# Altium PCB PCB_TPEL_Non_Isolated_DC_DC.PcbDoc
Units mil, origin at the board's own origin, x right, y up, seen from the top; angles counter-clockwise.
Board outline 6000 x 4000 mil, 2 copper layers (Top Layer, Bottom Layer); 65 components, 39 nets, 203 pads, 0 vias.
Unrouted connection lines stored in the file: 150.
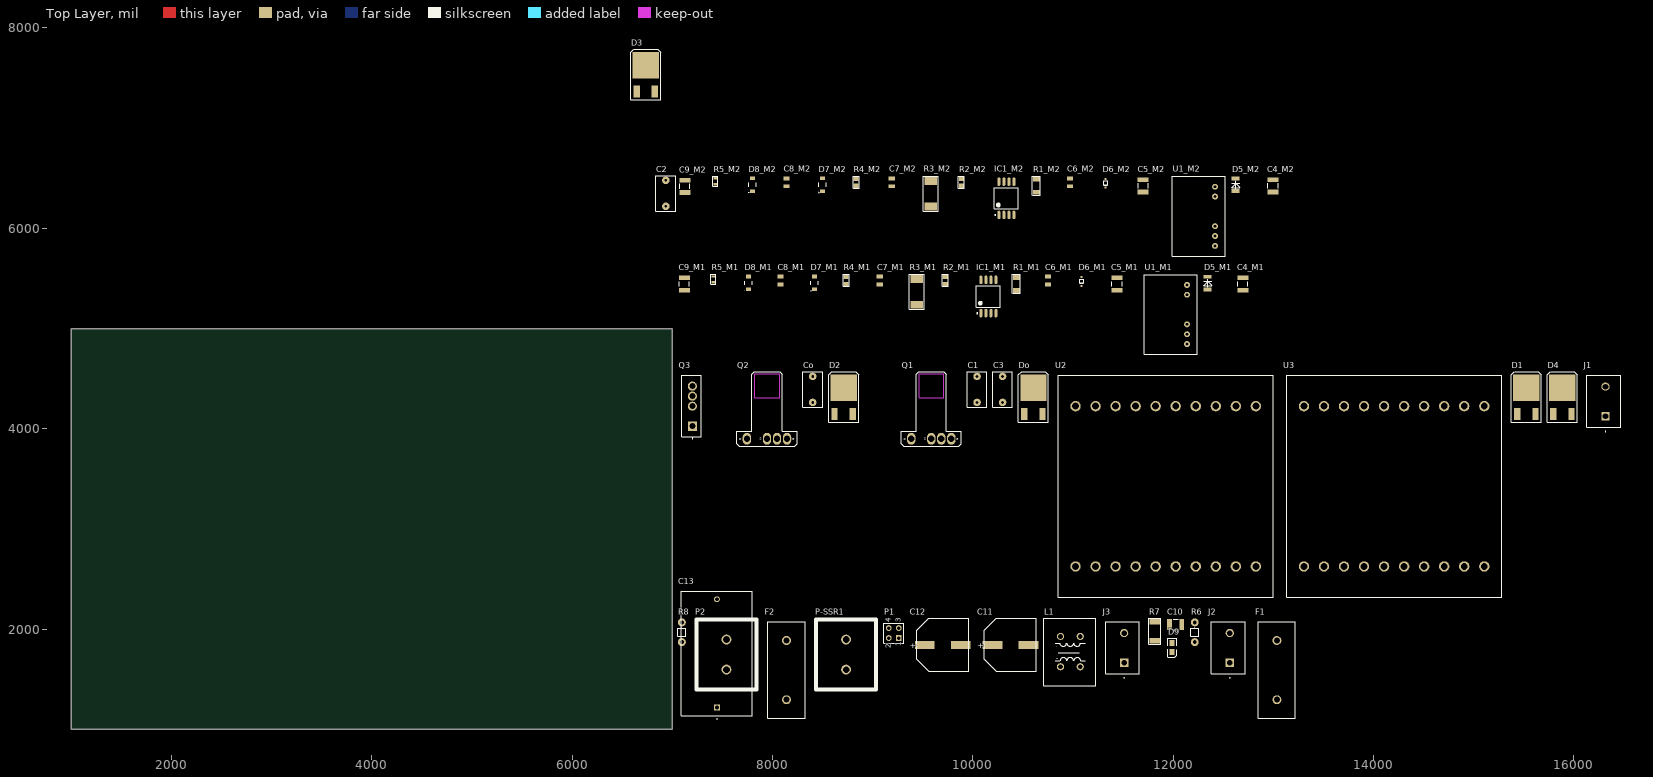
[diagram p0: Top Layer view]
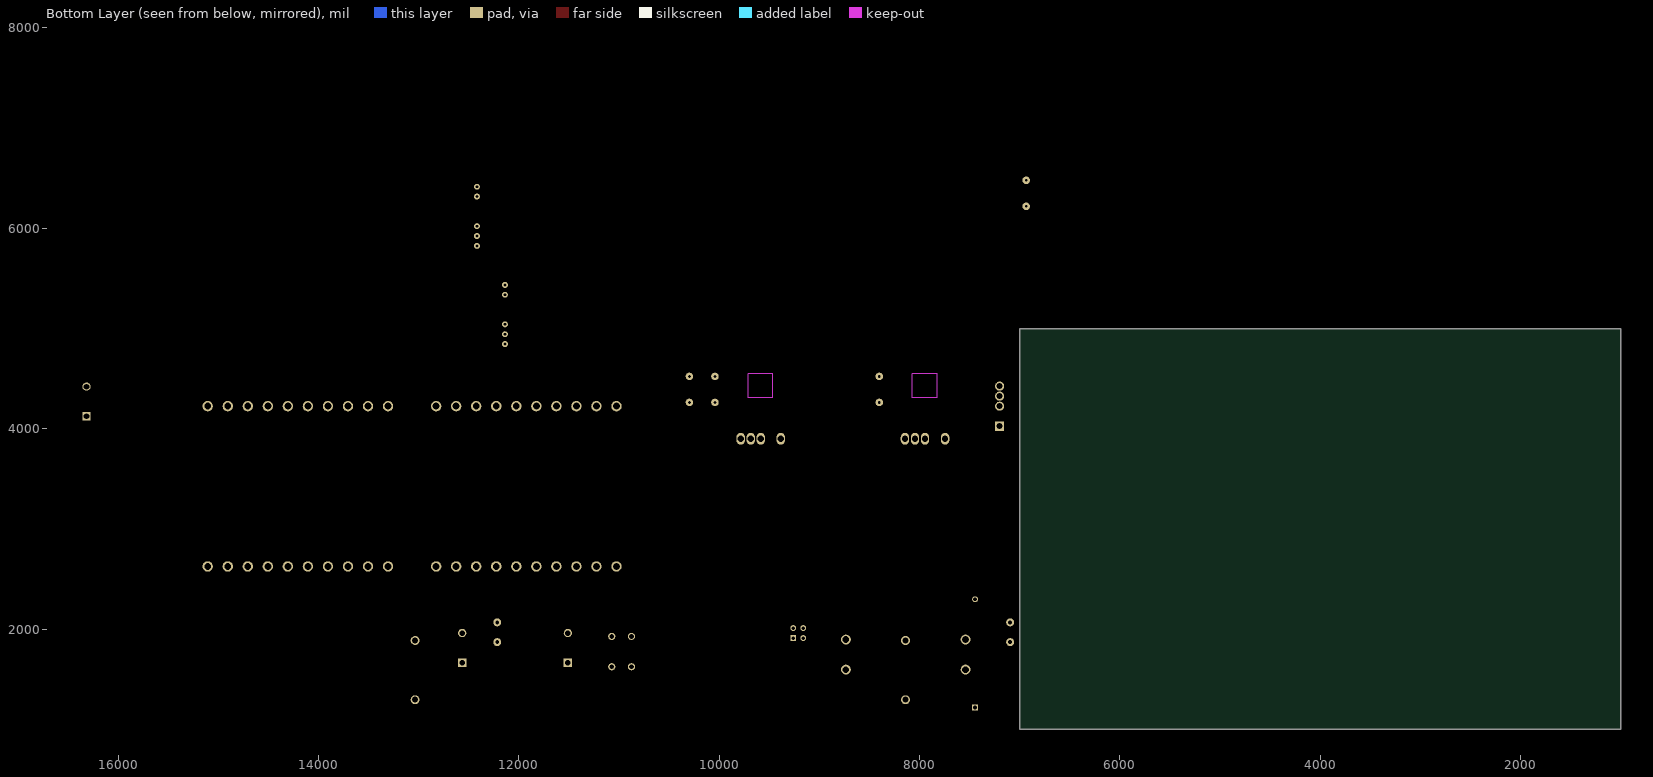
[diagram p1: Bottom Layer view, seen from below]

## Layer stack, top to bottom
Top Solder: solder mask 0.4, Solder Resist, Dk 3.5
Top Layer: signal copper 1.4
Dielectric 1: dielectric 12.6, FR-4, Dk 4.8
Bottom Layer: signal copper 1.4
Bottom Solder: solder mask 0.4, Solder Resist, Dk 3.5

## Board outline
1000,1000 7000,1000 7000,5000 1000,5000

## Design rules (kind name [scope] priority, off if disabled: settings)
Clearance [All] p1: gap=10 ignorepadtopadclearanceinfootprint=FALSE except(0: Arc-Hole Track-Hole SMDPad-Hole THPad-Hole Via-Hole Fill-Hole Poly-Hole Region-Hole Text-Hole)
PolygonConnect [All] p1: connectstyle=Relief reliefconductorwidth=10 reliefentries=4 polygonreliefangle="90 Angle" airgapwidth=10
RoomDefinition RoomDefinition_1 [False vs False] p1: confinementstyle=ConfineIn formatcopy=TRUE lockcomponents=FALSE outline 5890,9240 7480,9240 7480,7970 5890,7970
RoutingVias [All] p1: holewidth=28 width=50 viastyle="Through Hole" minholewidth=28 minwidth=50 maxholewidth=28 maxwidth=50
SolderMaskExpansion [All] p1: expansion=4 istentingtop=FALSE
Width [All] p1: maxlimit=10 minlimit=10 preferedwidth=10
30 further rules are at their usual default settings.

## Classes and differential pairs
channel class Driver: M1 M2
net class Signal: +12V MS2 NetC7_M1_1 NetC7_M1_2 NetC7_M2_1 NetC7_M2_2 Sig1 Sig2
net class Sig[2..1]: Sig1 Sig2
net class Power: G1 G2 MS2 NetC1_1 NetC1_2 NetC2_2 NetC3_1 NetC3_2 NetC13_1 NetD1_1 NetF1_1 NetF2_1 NetF2_2 NetQ1_2 NetU2_11 PGND Vin1
net class MS[2..1]: MS2
net class G[2..1]: G1 G2
net class Driver: G1 G2 MS2 NetC5_M1_2 NetC5_M2_2 NetC8_M1_1 NetC8_M2_1 NetD5_M1_1 NetD5_M2_1 NetD7_M1_2 NetD7_M2_2 NetIC1_M1_7 NetIC1_M2_7
net class +12: +12V MS2 NetC11_1 NetC11_2 NetD9_1
component class "Power Board": C1 C2 C3 Co D1 D2 D3 D4 Do J1 Q1 Q2 Q3 U2 U3
component class Main_Clean: C10 C11 C12 C13 D9 F1 F2 J2 J3 L1 P1 P2 P-SSR1 R6 R7 R8
component class M2: C4_M2 C5_M2 C6_M2 C7_M2 C8_M2 C9_M2 D5_M2 D6_M2 D7_M2 D8_M2 IC1_M2 R1_M2 R2_M2 R3_M2 R4_M2 R5_M2 U1_M2
component class M1: C4_M1 C5_M1 C6_M1 C7_M1 C8_M1 C9_M1 D5_M1 D6_M1 D7_M1 D8_M1 IC1_M1 R1_M1 R2_M1 R3_M1 R4_M1 R5_M1 U1_M1

## Components (designator, comment, footprint, x,y, rotation, side; value= is the part's Value field where it differs from the comment)
C1 "C_ceram_HV" CAP_250V 10140,4215 r90 top
C2 "C_ceram_HV" CAP_250V 6836.57,6527.09 r270 top
C3 "C_ceram_HV" CAP_250V 10395,4215 r90 top
C4_M1 "Cer_large" CAPC3227X25N 12695,5445 r90 top value=22mkF (schematic designator C4)
C4_M2 "Cer_large" CAPC3227X25N 12995,6425 r90 top value=22mkF (schematic designator C4)
C5_M1 "Cer_large" CAPC3227X25N 11440,5445 r90 top value=22mkF (schematic designator C5)
C5_M2 "Cer_large" CAPC3227X25N 11700,6425 r90 top value=22mkF (schematic designator C5)
C6_M1 "C0805C104K5RAC" C_0805 10750,5440 r90 top value=0.1uF (schematic designator C6)
C6_M2 "C0805C104K5RAC" C_0805 10970,6420 r90 top value=0.1uF (schematic designator C6)
C7_M1 "C0805C100J1GAC" C_0805 9070,5440 r90 top value=10pF (schematic designator C7)
C7_M2 "C0805C100J1GAC" C_0805 9190,6420 r90 top value=10pF (schematic designator C7)
C8_M1 "C0805C104K5RAC" C_0805 8080,5440 r90 top value=0.1uF (schematic designator C8)
C8_M2 "C0805C104K5RAC" C_0805 8140,6420 r90 top value=0.1uF (schematic designator C8)
C9_M1 "Cer_large" CAPC3227X25N 7120,5445 r90 top value=22mkF (schematic designator C9)
C9_M2 "Cer_large" CAPC3227X25N 7125,6420 r90 top value=22mkF (schematic designator C9)
C10 "Cer_large" CAPC3227X25N 12025,2045 r0 top value=22mkF
C11 "NACEW102M25V12.5X14" Cap_pol 8985,2980 r0 top value="1 mF"
C12 "NACEW102M25V12.5X14" Cap_pol 8310,2980 r0 top value="1 mF"
C13 "B32924P3335M000" B32924P_(31.5_x_18) 7445,1215 r90 top
Co "C_ceram_HV" CAP_250V 8500,4215 r90 top
D1 "Diode" Dpak 15375,4065 r0 top
D2 "Diode" Dpak 8560,4065 r0 top
D3 "Diode" Dpak 6585.55,7284.81 r0 top
D4 "Diode" Dpak 15735,4065 r0 top
D5_M1 "Zener_1.8V" SOD123 12225,5505 r90 top value=1.8V (schematic designator D5)
D5_M2 "Zener_1.8V" SOD123 12505,6485 r90 top value=1.8V (schematic designator D5)
D6_M1 "DZ2J220M0L" SOD323F 11085,5470 r90 top value="22V, 200mW" (schematic designator D6)
D6_M2 "DZ2J220M0L" SOD323F 11325,6450 r90 top value="22V, 200mW" (schematic designator D6)
D7_M1 "MMSZ4678T1G" CAPM3216X18N 8420,5455 r90 top value="6V, 500mW" (schematic designator D7)
D7_M2 "MMSZ4678T1G" CAPM3216X18N 8500,6435 r90 top value="6V, 500mW" (schematic designator D7)
D8_M1 "MMSZ4678T1G" CAPM3216X18N 7760,5455 r90 top value="6V, 500mW" (schematic designator D8)
D8_M2 "MMSZ4678T1G" CAPM3216X18N 7800,6435 r90 top value="6V, 500mW" (schematic designator D8)
D9 "LED1" 0805_LED 11990,1815 r180 top
Do "Diode" Dpak 10455,4065 r0 top
F1 "0PTF0075P" 0PTF0075P 13035,1295 r90 top
F2 "0PTF0075P" 0PTF0075P 8140,1295 r90 top
IC1_M1 "ACPL-H342" SOIC127P970X330-8N 10155,5320 r90 top value="2,5 A, 12-30V" (schematic designator IC1)
IC1_M2 "ACPL-H342" SOIC127P970X330-8N 10335,6300 r90 top value="2,5 A, 12-30V" (schematic designator IC1)
J1 "1766453" 1766453 16315,4125 r90 top
J2 "1766453" 1766453 12565,1665 r90 top
J3 "1766453" 1766453 11510,1665 r90 top
L1 "Commom_mode_choke" Common_mode 10950,1730 r0 top value="20 mH 0.5 A"
P1 "Header 2X2" HDR2X2 9260,1910 r90 top
P2 "MB322-750M02" 2_HOLES_7.5 7540,1895 r90 top value="2 poles, 16A, 750V"
P-SSR1 "MB322-750M02" 2_HOLES_7.5 8735,1895 r90 top value="2 poles, 16A, 750V"
Q1 "Cree_4wires" VT4_SicMosfet 9585,3900 r90 top
Q2 "Cree_4wires" VT4_SicMosfet 7945,3900 r90 top
Q3 "NTH4L015N065SC1" NTH4L015N065SC1 7200,4025 r90 top
R1_M1 "RK73H2BTTD1002F" SMD_1206 10435,5420 r90 top value="10k, 0.25 W" (schematic designator R1)
R1_M2 "RK73H2BTTD1002F" SMD_1206 10635,6400 r90 top value="10k, 0.25 W" (schematic designator R1)
R2_M1 "RK73H2ATTD1600F" SMD_0805 9725,5480 r90 top value="160R, 0.125W" (schematic designator R2)
R2_M2 "RK73H2ATTD1600F" SMD_0805 9885,6460 r90 top value="160R, 0.125W" (schematic designator R2)
R3_M1 "RK73B3ATTE120J" SMD_2512 9440,5365 r90 top value="12, 1W" (schematic designator R3)
R3_M2 "RK73B3ATTE120J" SMD_2512 9580,6345 r90 top value="12, 1W" (schematic designator R3)
R4_M1 "RK73H2ATTD1600F" SMD_0805 8735,5480 r90 top value="160R, 0.125W" (schematic designator R4)
R4_M2 "RK73H2ATTD1600F" SMD_0805 8835,6460 r90 top value="160R, 0.125W" (schematic designator R4)
R5_M1 "R4K7" smd_0603 7410,5490 r90 top value="4.7K, 0.125W" (schematic designator R5)
R5_M2 "R4K7" smd_0603 7430,6470 r90 top value="4.7K, 0.125W" (schematic designator R5)
R6 "Varistor" "Axial 0.2" 12215,1870 r90 top value=615V
R7 "R300" SMD_2010 11815,1975 r90 top value="300, 0.125W"
R8 "Varistor" "Axial 0.2" 7095,1870 r90 top value=615V
U1_M1 "MGJ2D242005SC" MGJ2 12315,5160 r0 top value=2W (schematic designator U1)
U1_M2 "MGJ2D242005SC" MGJ2 12595,6140 r0 top value=2W (schematic designator U1)
U2 "B66368B1020T1" B66368B1020T1 11025,2625 r0 top
U3 "B66368B1020T1" B66368B1020T1 13305,2625 r0 top

## Footprints (in the part's own frame and the unit in brackets; to place one, negate y for a bottom-side part, rotate by r counter-clockwise, add the part's x,y. Pads: shape width x height; smd on the part's side, far side on the other; paste and mask are expansions set on the pad)
0PTF0075P [mm]
  round 2.25 hole 1.5: 1(0,0) 2(15,0)
  round 1.325 hole 2.65 unplated: MH1(7.5,0)
  silkscreen extent -4.7,-4.7 19.7,4.7, body extent -4.7,-4.7 19.7,4.7, height 11.42
2_HOLES_7.5 [mm]
  round 2.5 hole 1.7: 1(-7.62,0) 2(0,0)
  silkscreen extent -12.7,-7.62 5.08,7.62
0805_LED [mil]
  rect 50x60 smd: A(0.2,-44.8) K(0.2,45.2)
  silkscreen extent -45,-95 45,95
1766453 [mm]
  rect 2.1x2.1 hole 1.4: 1(0,0)
  round 2.1 hole 1.4: 2(7.5,0)
  silkscreen extent -3.9,-3.87 10.35,4.7, body extent -2.9,-3.89 10.3,4.71, height 12.6
"Axial 0.2" [mm]
  round 2 hole 1: 1(0,0) 2(5,0)
  silkscreen extent 1.4,-1 3.68,1
B32924P_(31.5_x_18) [mm]
  rect 1.5x1.5 hole 1: 1(0,0)
  round 1.5 hole 1: 2(27.5,0)
  silkscreen extent -2.9,-9 29.5,9, body extent -1.94,-9 29.56,9, height 32.85
B66368B1020T1 [mm]
  round 2.625 hole 1.75: 1(0,0) 2(5.08,0) 3(10.16,0) 4(15.24,0) 5(20.32,0) 6(25.4,0) 7(30.48,0) 8(35.56,0) 9(40.64,0) 10(45.72,0) 11(45.72,40.64) 12(40.64,40.64) 13(35.56,40.64) 14(30.48,40.64) 15(25.4,40.64) 16(20.32,40.64) 17(15.24,40.64) 18(10.16,40.64) 19(5.08,40.64) 20(0,40.64)
  silkscreen extent -4.39,-7.78 50.11,48.42, body extent -4.39,-7.78 50.11,48.42, height 41
C_0805 [mm]
  rect 1x1.6 smd: 1(0,0) 2(2,0)
  body extent 0.02,-0.62 2.02,0.63, height 0.78
CAP_250V [mm]
  round 1.905 hole 0.7: 1(1.2,2.5) 2(7.8,2.5)
  silkscreen extent 0,0 9,5
Cap_pol [mil]
  rect 196.85x78.74 smd mask+4: 1(1210,-1140)
  rect 196.85x78.74 smd: 2(1570,-1140)
  silkscreen extent 1130,-1400 1650,-870
CAPC3227X25N [mm] "Chip Capacitor, 2-Leads, Body 3.2x2.7mm, IPC Medium Density"
  rect 1.15x2.8 smd: 1(-1.575,0) 2(1.575,0)
  silkscreen extent -0.6,-1.3 0.6,1.3, body extent -1.75,-1.35 1.75,1.35, height 2.5
CAPM3216X18N [mm]
  rect 0.91x1.22 smd: 1(-1.635,0) 2(1.635,0)
  silkscreen extent -2.04,-0.95 0.48,1, body extent -1.42,-0.9 1.42,0.9, height 1.35
Common_mode [mm]
  round 1.8 hole 1.2: 1(-1.9,5) 2(-1.9,-2.7) 3(3.1,-2.7) 4(3.1,5)
  silkscreen extent -6.1,-7.5 7,9.6
Dpak [mm]
  rect 1.6x3 smd: 1(1.51,2.037) 3(6.11,2.037)
  rect 6.7x6.7 smd: 2(3.81,8.687)
  silkscreen extent 0,0 7.62,12.78, body extent 0.49,1.71 7.03,11.65, height 2.41
HDR2X2 [mm] "Connector; Header; 2x2 Position"
  rect 1.5x1.5 hole 0.9: 1(0,0)
  round 1.5 hole 0.9: 2(0,2.54) 3(2.54,0) 4(2.54,2.54)
  silkscreen extent -1.27,-1.27 3.81,3.81
MGJ2 [mm]
  round 1.5 hole 0.7: 1(-4.5,7) 1(-4.5,7) 2(-4.5,4.5) 5(-4.5,-3) 6(-4.5,-5.5) 7(-4.5,-8)
  silkscreen extent -15.4,-10.64 -1.9,9.6
NTH4L015N065SC1 [mm]
  rect 2.31x2.31 hole 1.54: 1(0,0)
  round 2.31 hole 1.54: 2(5.08,0) 3(7.62,0) 4(10.16,0)
  silkscreen extent -3.2,-2.3 12.88,2.7, body extent -2.72,-2.3 12.88,2.7, height 25.66
smd_0603 [mm]
  rect 0.6x0.9 smd: 1(-0.75,0) 2(0.75,0)
  silkscreen extent -1.27,-0.63 1.27,0.64
SMD_0805 [mm]
  rect 1.05x1.3 smd: 1(-0.889,0) 2(0.889,0)
  silkscreen extent -1.52,-0.76 1.52,0.76
SMD_1206 [mm]
  rect 1.25x1.7 smd: 1(-1.016,0) 2(2.286,0)
  silkscreen extent -1.78,-1.02 3.05,1.02
SMD_2010 [mm]
  rect 1.4x2.6 smd: 1(-2.286,0) 2(2.54,0)
  silkscreen extent -3.17,-1.52 3.43,1.52
SMD_2512 [mm]
  rect 2x3.2 smd: 1(-3.25,0) 2(3.25,0)
  silkscreen extent -4.44,-1.91 4.44,1.91
SOD123 [mm]
  rect 1x2 smd: 1(-2.9,-3) 2(0.3,-3)
  silkscreen extent -2.3,-4 -0.3,-2
SOD323F [mm]
  rect 0.5x0.5 smd: 1(1.1,0) 2(-1.1,0)
  silkscreen extent -0.5,-0.5 0.6,0.5, body extent -0.9,-0.67 0.9,0.67, height 0.8
SOIC127P970X330-8N [mm] "SOIC, 8-Leads, Body 6.1x6.8mm (max), Pitch 1.27mm, IPC Medium Density"
  oval 2.16x0.76 smd: 1(-4.225,1.905) 2(-4.225,0.635) 3(-4.225,-0.635) 4(-4.225,-1.905) 5(4.225,-1.905) 6(4.225,-0.635) 7(4.225,0.635) 8(4.225,1.905)
  silkscreen extent -4.35,-3.05 2.7,3.05, body extent -3.4,-3.05 3.4,3.05, height 3.3
VT4_SicMosfet [mm]
  oval 3x2.15 hole 1.6: 1(0,5.08) 2(0,0) 3(0,-2.54) 4(0,-5.08)
  Keep-Out Layer lines w0.254: 10.414,3.048 16.51,3.048 16.51,-3.175 10.414,-3.175 10.414,3.048
  silkscreen extent -1.91,-7.62 17.02,7.62

## Part data
C4_M1 C4_M2 C5_M1 C5_M2 C9_M1 C9_M2 C10: Package=1210, Order code=1759466, Price=0.407, Supplier=Farnel, Type=16V
C6_M1 C6_M2 C8_M1 C8_M2: "0.1u, 50V", Manufacturer=Kemet, Package="smd 0805", Order code=6576631, Price=0,06, Supplier=Elfa, Type=C0805C104K5RAC
C7_M1 C7_M2: "10p, 100V", Manufacturer=Kemet, Package="smd 0805", Order code=6576805, Price=0,266, Supplier=Elfa, Type=C0805C100J1GAC
C13: "Capacitor", Manufacturer_Name=TDK, Mouser Part Number=871-B32924P3335M000, Datasheet Link=https://product.tdk.com/system/files/dam/doc/product/capacitor/film/emi/data_sheet/x2_b32922_924_p_q.pdf, Height=33mm, Manufacturer_Part_Number=B32924P3335M000, Mouser Price/Stock=https://www.mouser.co.uk/ProductDetail/EPCOS-TDK/B32924P3335M000?qs=KUoIvG%2F9IlY7%252B78GbxRzbA%3D%3D
D1 D2 D3 D4 Do: "Default Diode", Code_JEDEC=DO-214-AB, LatestRevisionDate=17-Jul-2002, LatestRevisionNote="Re-released for DXP Platform.", PackageDescription="DO-214-AB/SMC; 2 C-Bend Leads; Body 7.9 x 5.9 mm, inc. leads (LxW)", PackageReference=SMC, PackageVersion=Sep-1996, Published=8-Jun-2000, Publisher="Altium Limited"
D5_M1 D5_M2: "Zener diode", Package=SOD-123, Order code=1459115, Price=0.172, Supplier=Farnell, Type=0.5W
D6_M1 D6_M2: Package=SOD323F, Order code=2285315, Price=0.041, Supplier=Farnel, Type="Zener diode"
D7_M1 D7_M2 D8_M1 D8_M2: library part Zener_MMSZ5233BT1G, "6V, 500mW, Zener Diodes", Manufacturer="ON Semiconductor", Package=SOD-123-2, PartNumber=MMSZ5233BT1G, Order code=863-MMSZ5233BT1G, Price=0,18, Supplier=Mouser, Type="Zener Diodes"
D9: "Typical RED GaAs LED", LatestRevisionDate=08-Jul-2005, LatestRevisionNote="Mech Layer 1 removed.", PackageDescription="LED; 2 Leads", PackageReference=LED-1, Published=8-Jun-2000, Publisher="Altium Limited"
F1 F2: "Fuse", Manufacturer_Name=LITTELFUSE, Mouser Part Number=576-0PTF0075P, Arrow Part Number=0PTF0075P, Arrow Price/Stock=https://www.arrow.com/en/products/0ptf0075p/littelfuse?region=europe, Datasheet Link=https://media.digikey.com/pdf/Data%20Sheets/Littelfuse%20PDFs/0PTF0075P_Dwg.pdf, Height=11.5mm, Manufacturer_Part_Number=0PTF0075P, Mouser Price/Stock=https://www.mouser.co.uk/ProductDetail/Littelfuse/0PTF0075P?qs=gu7KAQ731UQYbEqVl9aylw%3D%3D
IC1_M1 IC1_M2: Manufacturer=Avago, Package=SSO-8, Order code=1833408, Price=2, Supplier=Farnell, Type=ACPL-H342
J1 J2 J3: "Connector", Manufacturer_Name="Phoenix Contact", Mouser Part Number=651-1766453, Datasheet Link=http://www.phoenixcontact.com/de/produkte/1766453/pdf, Height=12mm, Manufacturer_Part_Number=1766453, Mouser Price/Stock=https://www.mouser.co.uk/ProductDetail/Phoenix-Contact/1766453?qs=s6DiDDoRpTbteEwY3ZEIDg%3D%3D
L1: Manufacturer="Wьrth Elektronik", Package=Trough_hole, Order code=15857854, Price=4,54, Supplier=Elfa, Type="Common mode choke"
P1: "Header, 2-Pin, Dual row", LatestRevisionDate=17-Jul-2002, LatestRevisionNote="Re-released for DXP Platform.", Publisher="Altium Limited"
P2 P-SSR1: Package="7.5 mm", Order code=48-397-07, Price=0.43, Supplier=Elfa, Type=MB322-750M02
Q3: "MOSFET (N-Channel)", Manufacturer_Name=onsemi, Mouser Part Number=863-NTH4L015N065SC1, Arrow Part Number=NTH4L015N065SC1, Arrow Price/Stock=https://www.arrow.com/en/products/nth4l015n065sc1/on-semiconductor?region=nac, Datasheet Link=https://www.onsemi.com/pdf/datasheet/nth4l015n065sc1-d.pdf, Height=25.56mm, Manufacturer_Part_Number=NTH4L015N065SC1, Mouser Price/Stock=https://www.mouser.co.uk/ProductDetail/onsemi/NTH4L015N065SC1?qs=stqOd1AaK7%252BX4HlQwOMOTg%3D%3D
R1_M1 R1_M2: "10k, 0.25 W", Manufacturer=KOA, Package="smd 1206", datasheet=https://www1.elfa.se/data1/wwwroot/assets/datasheets/06016752.pdf, Order code=6019731, Price=0,111, Supplier=Elfa, Type=RK73H2BTTD1002F
R2_M1 R2_M2 R4_M1 R4_M2: "160R, 0.125W", Manufacturer=KOA, Package="smd 0805", Order code=60-173-05, Price=0.097, Supplier=Elfa, Type="1%, 150V"
R3_M1 R3_M2: Manufacturer=KOA, Package="smd 2512", Order code=60-205-98, Price=0,144, Supplier=Elfa, Type="200V, 5%"
R5_M1 R5_M2: Package="smd 0603", Order code=9332154, Price=0.01, Supplier=Farnel, Type="16V, 1%"
R6 R8: Manufacturer=EPCOS, Package="48X8X6 mm", Order code=60-307-55, Price=0,38, Supplier=Elfa, Type="Res Var"
R7: Package="smd 2010", Type="16V, 1%"
U1_M1 U1_M2: Package=7dip, Order code=2420071, Price=7.49, Supplier=Farnell, Type=12V/20V/-5V
U2 U3: "Undefined or Miscellaneous", Manufacturer_Name=TDK, Mouser Part Number=871-B66368B1020T1, Arrow Part Number=B66368B1020T1, Arrow Price/Stock=https://www.arrow.com/en/products/b66368b1020t1/epcos-tdk?region=nac, Datasheet Link=https://www.mouser.com/datasheet/2/400/etd_49_25_16-1220447.pdf, Height=40.9mm, Manufacturer_Part_Number=B66368B1020T1, Mouser Price/Stock=https://www.mouser.co.uk/ProductDetail/EPCOS-TDK/B66368B1020T1?qs=fWY6Jreybtns4G%252BQgkB59A%3D%3D
C11 C12: Order code=16731346, Price=3,28, Supplier=Elfa, Type=25V

## Nets (pads, with @x,y where several pads share a name; then routed paths per layer and width w, separated by ;. In a path a pad name is that pad's centre, name@x,y a point inside that pad or via, vN(x,y) a via of type N, cw(c..) or ccw(c..) an arc to the next point about the centre after c; other vN are vias at no path point)
+12V: C4_M1.1 C4_M2.1 C12.1 L1.4 R7.1 U1_M1.1 U1_M2.1
G1: D7_M1.1 IC1_M1.6 Q1.4 R3_M1.2
G2: D7_M2.1 IC1_M2.6 Q2.4 R3_M2.2
MS2: C2.1 C4_M1.2 C4_M2.2 C5_M1.1 C5_M2.1 C6_M1.1 C6_M2.1 C8_M1.2 C8_M2.2 C9_M1.2 C9_M2.2 C10.1 C12.2 C13.2 Co.1 D6_M1.1 D6_M2.1 D8_M1.1 D8_M2.1 D9.K IC1_M1.2 IC1_M1.4 IC1_M2.2 IC1_M2.4 L1.3 P1.2 P1.4 P2.1 Q2.2 Q2.3 R1_M1.2 R1_M2.2 R4_M1.1 R4_M2.1 R5_M1.1 R5_M2.1 R8.1 U1_M1.2 U1_M1.6 U1_M2.2 U1_M2.6
NetC1_1: C1.1 D4.1 U3.6 U3.7 U3.8 U3.9 U3.10
NetC1_2: C1.2 D2.1 Q2.1 U3.16 U3.17 U3.18 U3.19 U3.20
NetC2_2: C2.2 D2.2 D3.1
NetC3_1: C3.1 D4.2 Do.1
NetC3_2: C3.2 D1.2 D3.2
NetC5_M1_2: C5_M1.2 C6_M1.2 D6_M1.2 IC1_M1.8 R1_M1.1 U1_M1.7
NetC5_M2_2: C5_M2.2 C6_M2.2 D6_M2.2 IC1_M2.8 R1_M2.1 U1_M2.7
NetC7_M1_1: C7_M1.1 IC1_M1.1 R2_M1.2
NetC7_M1_2: C7_M1.2 IC1_M1.3 R4_M1.2
NetC7_M2_1: C7_M2.1 IC1_M2.1 R2_M2.2
NetC7_M2_2: C7_M2.2 IC1_M2.3 R4_M2.2
NetC8_M1_1: C8_M1.1 C9_M1.1 D5_M1.2 IC1_M1.5 R5_M1.2
NetC8_M2_1: C8_M2.1 C9_M2.1 D5_M2.2 IC1_M2.5 R5_M2.2
NetC11_1: C11.1 J3.1 L1.1
NetC11_2: C11.2 J3.2 L1.2
NetC13_1: C13.1 Co.2 Do.2 P-SSR1.2
NetD1_1: D1.1 J1.1 Q1.1 U2.1 U2.2 U2.3 U2.4 U2.5 U2.6 U2.7 U2.8 U2.9 U2.10
NetD5_M1_1: D5_M1.1 U1_M1.5
NetD5_M2_1: D5_M2.1 U1_M2.5
NetD7_M1_2: D7_M1.2 D8_M1.2
NetD7_M2_2: D7_M2.2 D8_M2.2
NetD9_1: D9.A R7.2
NetF1_1: F1.1 J2.1
NetF2_1: F2.1 P-SSR1.1 R8.2
NetF2_2: F2.2 P2.2
NetIC1_M1_7: IC1_M1.7 R3_M1.1
NetIC1_M2_7: IC1_M2.7 R3_M2.1
NetQ1_2: Q1.2 Q1.3
NetU2_11: U2.11 U2.12 U2.13 U2.14 U2.15 U2.16 U2.17 U2.18 U2.19 U2.20 U3.1 U3.2 U3.3 U3.4 U3.5
NetU3_11: U3.11 U3.12 U3.13 U3.14 U3.15
PE: C10.2
PGND: J2.2 R6.1
Sig1: P1.1 R2_M1.1
Sig2: P1.3 R2_M2.1
Vin1: F1.2 J1.2
pads on no net: D1.3 D2.3 D3.3 D4.3 Do.3 F1.MH1 F2.MH1 Q3.1 Q3.2 Q3.3 Q3.4 R6.2

## Text inside footprints (layer, text, board x,y; h text height)
C11: Top Overlay "+" at 10045,1810 h60
C12: Top Overlay "+" at 9370,1810 h60
P1: Top Overlay "1" at 9280,1830 h50 r90; Top Overlay "2" at 9180,1810 h50 r90; Top Overlay "4" at 9180,2070 h50 r90; Top Overlay "3" at 9280,2070 h50 r90
Q1: Top Overlay "S" at 9515,3890 h23.11; Top Overlay "D" at 9310,3885 h23.11; Top Overlay "G" at 9835,3885 h23.11
Q2: Top Overlay "S" at 7875,3890 h23.11; Top Overlay "D" at 7670,3885 h23.11; Top Overlay "G" at 8195,3885 h23.11